# EAGLE board Peripheral_MABOS (EAGLE 9.7.0)
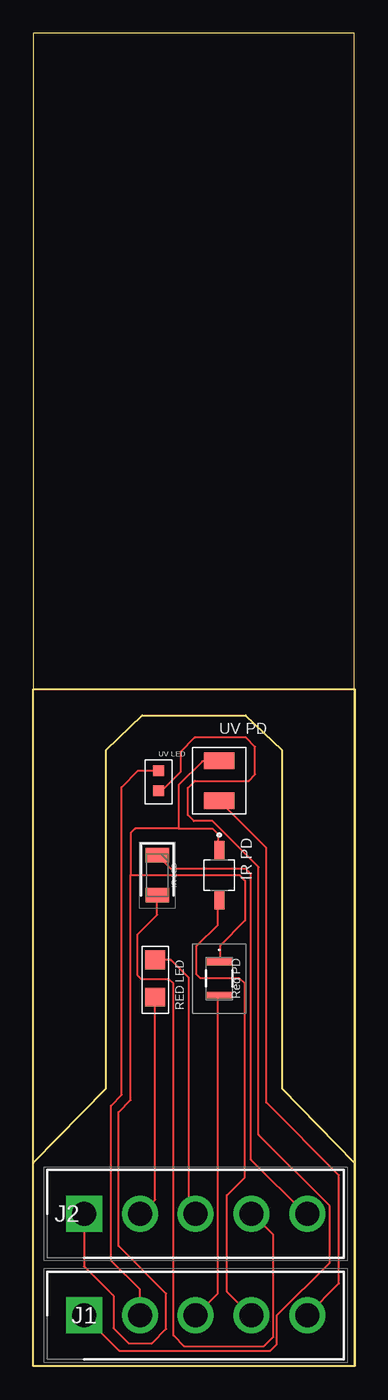
[diagram p0: board, top side]

Size 24.13 x 100 mm. Coordinates in mm from the lower left corner, seen from the top.
Outline: 0,0 24.11,0 24.11,15.21
Outline: 24.11,15.21 24.11,100 0,100 0,50.8
Outline: 0,50.8 24.13,50.8 24.13,0 0,0
Outline: 0,0 0,15.24
Outline: 0,15.24 0,50.8
Outline: 0,15.24 5.46,20.83 5.46,46.23 8.18,48.82 15.95,48.82 18.67,46.23 18.67,20.83 24.11,15.26 24.11,15.21
Copper layers (1*16): Top 0.035mm / dielectric 1.5mm / Bottom 0.035mm
Design rules "default": minimum track width 6mil, minimum drill 0.35mm, track to track 6mil, track to pad 6mil, pad to pad 6mil, via to via 6mil, smd to smd 6mil, copper to edge 40mil, drill to drill 6mil, minimum pad ring 10mil, minimum via ring 8mil, stop-mask expansion 4mil, vias tented up to drill 0mil, thermal gap 10mil

## Footprints (pad centres in the part's own frame; a part is rotated, then mirrored left to right if it is on the bottom)
SFH2713 = smd 0.5 x 1.9: 1 -1.25,0; 2 1.25,0
XDCR_VEMD2023X01 = smd 1.35 x 0.75: A 1.9,0; C -1.9,0
SHDR5W114P0X419_1X5_2228X658X1 = drill 1.8 pad 2.7 square: 1 0,0 | drill 1.8 pad 2.7: 2 4.19,0; 3 8.38,0; 4 12.57,0; 5 16.76,0
LEDC3216X180N = smd 1.1 x 1.75: 1 -1.5,0; 2 1.5,0
REDLED = smd 1.4 x 1.5: IN 2.8,0; OUT 0,0
UVLED = smd 0.8 x 0.8: IN 0,0; OUT 0,1.5
UVPD = smd 2.3 x 1.23: IN 0,0; OUT 0,3

## Placement (x,y rotation side)
D1  REDPD  [SFH2713]  13.97,29.08 270 top
D2  IRPD  [XDCR_VEMD2023X01]  13.97,36.83 270 top
J1  5PIN_CONNECTOR  [SHDR5W114P0X419_1X5_2228X658X1]  3.81,3.81 0 top
J2  5PIN_CONNECTOR  [SHDR5W114P0X419_1X5_2228X658X1]  3.81,11.43 0 top
LED1  IRLED  [LEDC3216X180N]  9.31,36.83 270 top
U$1  REDLED  [REDLED]  9.16,30.48 270 top
U$2  UVLED  [UVLED]  9.41,43.18 0 top
U$3  UVPD  [UVPD]  13.97,42.42 0 top

## Library data of the parts
D1 = MABOS_components; DESCRIPTION: Photodiodes Silicon PIN Photodiode; HEIGHT: 0.7mm; MANUFACTURER_NAME: OSRAM; MANUFACTURER_PART_NUMBER: SFH 2713; MOUSER_PART_NUMBER: 720-SFH2713; MOUSER_PRICE-STOCK: https://www.mouser.co.uk/ProductDetail/OSRAM-Opto-Semiconductors/SFH-2713?qs=7MVldsJ5UayBhtoy5c4X7w%3D%3D
D2 = MABOS_components; AVAILABILITY: In Stock; DESCRIPTION: Photodiode 940nm 100ns 70° 2-SMD; MF: Vishay Semiconductor; MP: VEMD2023X01; PACKAGE: SMD-2 Vishay Semiconductor; PRICE: None; PURCHASE-URL: https://pricing.snapeda.com/search/part/VEMD2023X01/?ref=eda
J1 J2 = MABOS_components; DESCRIPTION: Samtec IPBT, 4.19mm Pitch, 5 Way, 1 Row PCB Terminal Block Header, Through Hole; HEIGHT: 10.29mm; MANUFACTURER_NAME: SAMTEC; MANUFACTURER_PART_NUMBER: IPBT-105-H1-T-S-K; MOUSER_PART_NUMBER: 200-IPBT105H1TSK; MOUSER_PRICE-STOCK: https://www.mouser.co.uk/ProductDetail/Samtec/IPBT-105-H1-T-S-K?qs=PB6%2FjmICvI0oo3MGzaPD2A%3D%3D
LED1 = MABOS_components; DESCRIPTION: Infrared Emitters 3.2x1.6mm IR SMD LED; HEIGHT: 1.8mm; MANUFACTURER_NAME: Kingbright; MANUFACTURER_PART_NUMBER: APTD3216F3C-P22; MOUSER_PART_NUMBER: 604-APTD3216F3C-P22; MOUSER_PRICE-STOCK: https://www.mouser.co.uk/ProductDetail/Kingbright/APTD3216F3C-P22?qs=fAHHVMwC%252Bbjo55EMkwMBzg%3D%3D
U$1-U$3 = MABOS_components

## Nets
GND: D1.1 D2.C J2.1 U$3.OUT
IR_IN: J2.5 LED1.1
IR_OUT: J2.4 LED1.2
IR_PD: D2.A J1.4
RED_IN: J2.3 U$1.OUT
RED_OUT: J2.2 U$1.IN
RED_PD: D1.2 J1.3
VIOLET_IN: J1.2 U$2.OUT
VIOLET_OUT: J1.1 U$2.IN
VIOLET_PD: J1.5 U$3.IN

## Tracks (layer width: path | path; a pad name or v marks a point on that pad's centre or on a via)
GND
  Top 0.152: 10.92,40.34 10.92,43.61 12.69,45.38 U$3.OUT | D2.C 13.87,38.86 13.87,39.93 13.46,40.34 10.92,40.34 | 10.92,40.34 7.64,40.34 7.32,40.01 7.32,36.85 | D1.1 14.02,30.48 14.02,31.55 15.9,33.43 15.9,36.42 15.47,36.85 7.32,36.85 | J2.1 3.81,7.49 6.02,5.28 6.02,2.85 7.14,1.72 8.91,1.72 9.98,2.8 9.98,5.44 6.4,9.02 6.4,19.05 7.32,19.96 7.32,36.85
IR_IN
  Top 0.152: J2.5 20.42,11.43 16.36,15.49 16.36,36.93 15.97,37.32 10.33,37.32 LED1.1
IR_OUT
  Top 0.152: LED1.2 9.3,35.2 9.3,33.86 7.82,32.38 7.82,29.34 8.13,29.03 10.19,29.03 10.52,28.7 10.52,2.31 11.35,1.47 17.3,1.47 17.98,2.16 17.98,9.91 16.46,11.43 J2.4
IR_PD
  Top 0.152: D2.A 13.87,34.9 13.87,33.12 12.27,31.52 12.27,29.39 12.55,29.11 15.47,29.11 15.88,28.7 15.88,14.17 14.53,12.83 14.53,5.59 16.31,3.81 J1.4
RED_IN
  Top 0.152: U$1.OUT 10.34,30.48 11.66,29.16 11.66,11.43 J2.3
RED_OUT
  Top 0.152: U$1.IN 9.14,27.58 9.14,12.5 8.08,11.43 J2.2
RED_PD
  Top 0.152: D1.2 13.87,27.74 13.87,5.49 J1.3
VIOLET_IN
  Top 0.152: J1.2 8,5.77 5.84,7.92 5.84,19.55 6.63,20.36 6.63,20.84 6.63,43.42 7.88,44.68 U$2.OUT
VIOLET_OUT
  Top 0.152: J1.1 6.45,1.17 17.8,1.17 18.29,1.65 18.29,3.81 22.25,7.77 22.25,12.04 16.92,17.37 16.92,37.44 13.46,40.89 12.06,40.89 11.61,41.35 11.61,43.38 12.14,43.92 16.18,43.92 16.66,44.4 16.66,46.47 15.98,47.15 12.11,47.15 11.05,46.09 11.05,44.57 9.67,43.18 U$2.IN
VIOLET_PD
  Top 0.152: J1.5 22.96,6.2 22.96,14.33 17.5,19.79 17.5,38.89 U$3.IN